# EAGLE board shield_opencm (EAGLE 9.5.1)
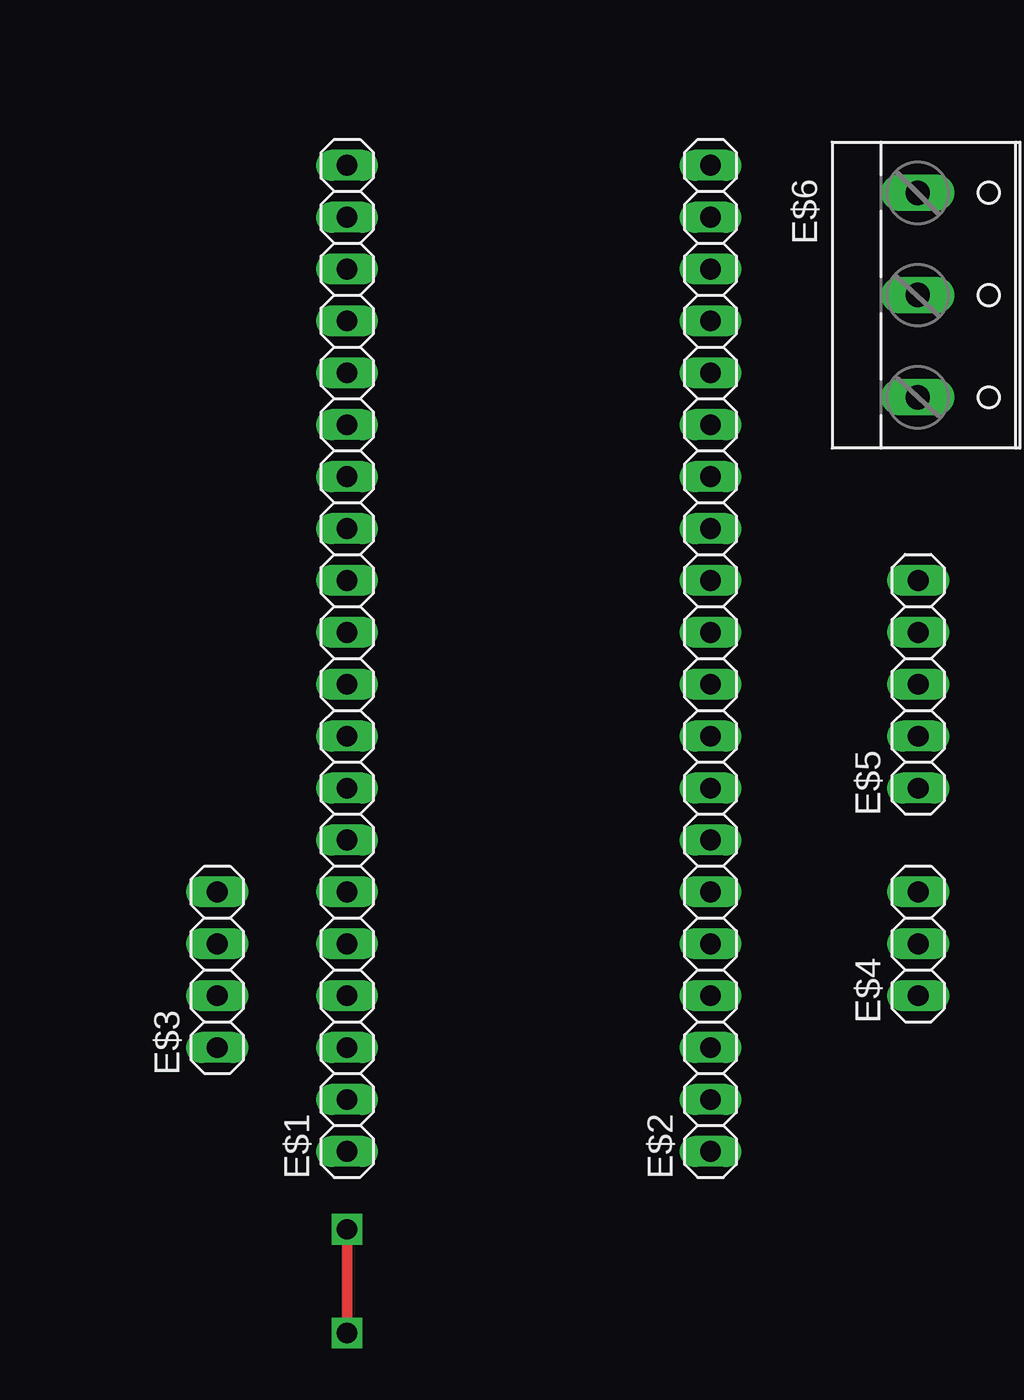
[diagram p0: board, top side]
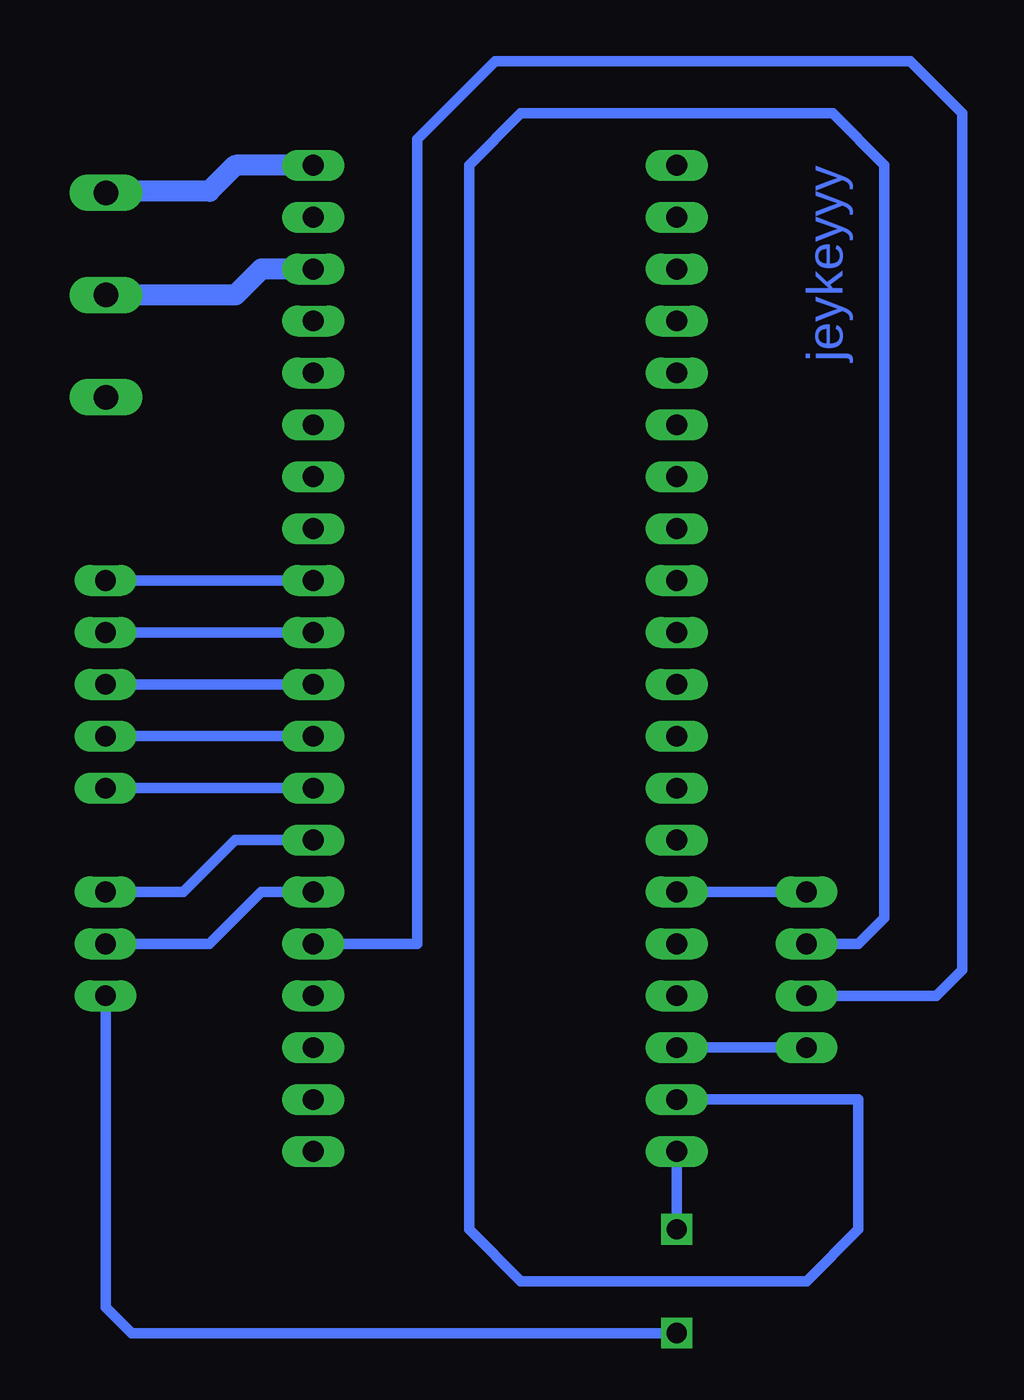
[diagram p1: board, bottom side, seen from below]

No outline drawn. Coordinates in mm, seen from the top.
Copper layers (1*16): Top 0.035mm / dielectric 1.5mm / Bottom 0.035mm
Design rules "default": minimum track width 6mil, minimum drill 0.35mm, track to track 6mil, track to pad 6mil, pad to pad 6mil, via to via 6mil, smd to smd 6mil, copper to edge 40mil, drill to drill 6mil, minimum pad ring 10mil, minimum via ring 8mil, stop-mask expansion 4mil, vias tented up to drill 0mil, thermal gap 10mil

## Footprints (pad centres in the part's own frame; a part is rotated, then mirrored left to right if it is on the bottom)
1X20 = drill 1.016 long: 1 -24.13,0; 2 -21.59,0; 3 -19.05,0; 4 -16.51,0; 5 -13.97,0; 6 -11.43,0; 7 -8.89,0; 8 -6.35,0; 9 -3.81,0; 10 -1.27,0; 11 1.27,0; 12 3.81,0; 13 6.35,0; 14 8.89,0; 15 11.43,0; 16 13.97,0; 17 16.51,0; 18 19.05,0; 19 21.59,0; 20 24.13,0
1X04 = drill 1.016 long: 1 -3.81,0; 2 -1.27,0; 3 1.27,0; 4 3.81,0
1X03 = drill 1.016 long: 1 -2.54,0; 2 0,0; 3 2.54,0
1X05 = drill 1.016 long: 1 -5.08,0; 2 -2.54,0; 3 0,0; 4 2.54,0; 5 5.08,0
W237-103 = drill 1.194 long: 1 -5,-1.29; 2 0,-1.29; 3 5,-1.29

## Placement (x,y rotation side)
E$1  [1X20]  41.91,66.04 90 top
E$2  [1X20]  59.69,66.04 90 top
E$3  [1X04]  35.56,50.8 90 top
E$4  [1X03]  69.85,52.07 90 top
E$5  [1X05]  69.85,64.77 90 top
E$6  [W237-103]  71.12,83.82 270 top

## Library data of the parts
E$1-E$5 = pinhead
E$6 = con-wago-500

## Nets
S$1: E$1.6 E$3.4
S$2: E$1.3 E$3.1
S$3: E$2.5 E$3.2
S$4: E$1.2 E$3.3
S$5: E$2.20
S$6: E$2.7 E$4.3
S$7: E$2.6 E$4.2
S$8: E$2.8 E$5.1
S$9: E$2.9 E$5.2
S$10: E$2.10 E$5.3
S$11: E$2.11 E$5.4
S$12: E$2.12 E$5.5
S$13: E$1.1 E$4.1
S$14: E$2.18

## Tracks (layer width: path | path; a pad name or v marks a point on that pad's centre or on a via)
S$1
  Bottom 0.508: E$3.4 E$1.6
S$2
  Bottom 0.508: E$3.1 E$1.3
S$3
  Bottom 0.508: E$3.2 29.21,49.53 27.94,50.8 27.94,92.71 30.48,95.25 50.8,95.25 54.61,91.44 54.61,52.07 E$2.5
S$4
  Bottom 0.508: E$3.3 33.02,52.07 31.75,53.34 31.75,90.17 34.29,92.71 49.53,92.71 52.07,90.17 52.07,38.1 49.53,35.56 35.56,35.56 33.02,38.1 33.02,44.45 E$1.2
S$5
  Bottom 1.016: E$2.20 63.5,90.17 64.77,88.9 69.85,88.9
S$6
  Bottom 0.508: E$2.7 63.5,57.15 66.04,54.61 E$4.3
S$7
  Bottom 0.508: E$2.6 62.23,54.61 64.77,52.07 E$4.2
S$8
  Bottom 0.508: E$2.8 68.58,59.69 E$5.1
S$9
  Bottom 0.508: E$2.9 E$5.2
S$10
  Bottom 0.508: E$2.10 E$5.3
S$11
  Bottom 0.508: E$2.11 E$5.4
S$12
  Bottom 0.508: E$2.12 E$5.5
S$13  (via drill 1 pad 1.3)
  Top 0.508: v41.91,38.1 v41.91,33.02
  Bottom 0.508: E$1.1 v41.91,38.1 | v41.91,33.02 68.58,33.02 69.85,34.29 E$4.1
S$14
  Bottom 1.016: E$2.18 62.23,85.09 63.5,83.82 69.85,83.82

## Text on the board
Bottom: jeykeyyy